# EAGLE board Analog Drum (EAGLE 9.3.1)
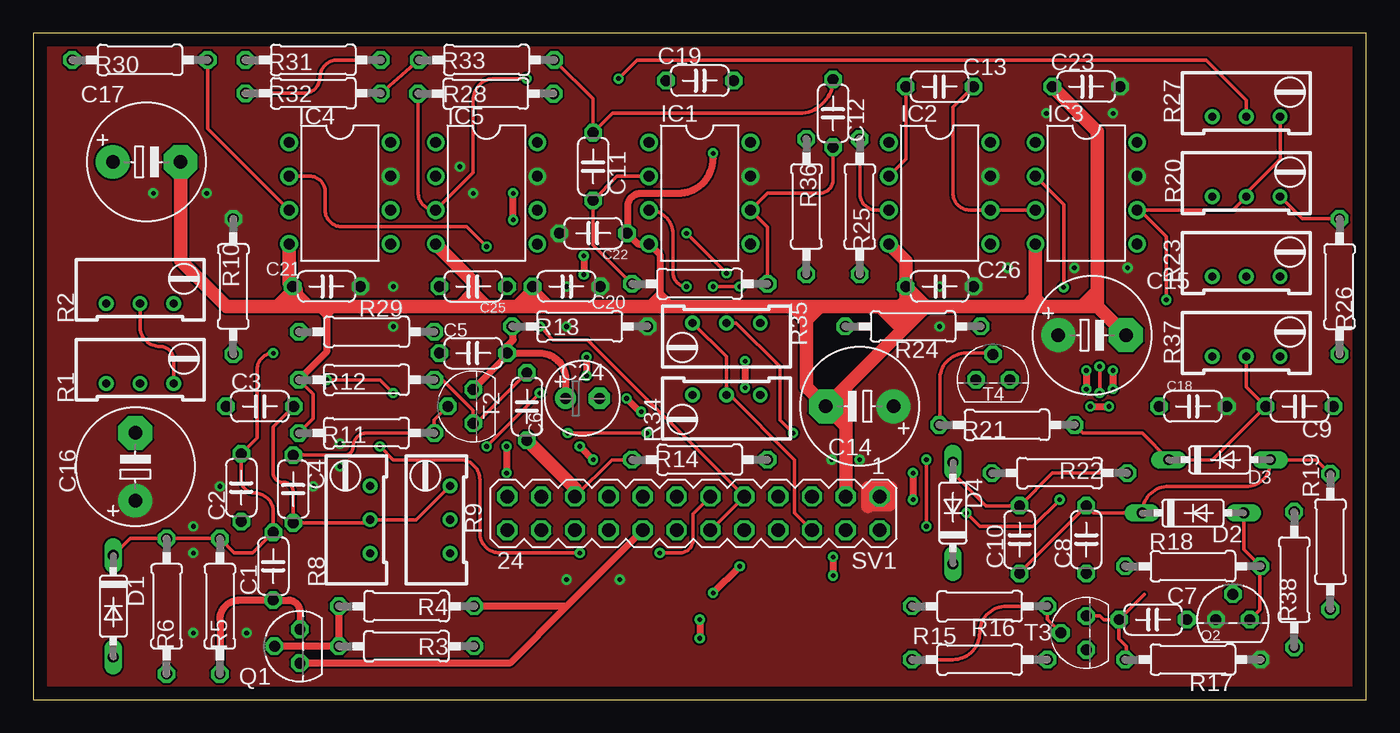
[diagram p0: board, top side]
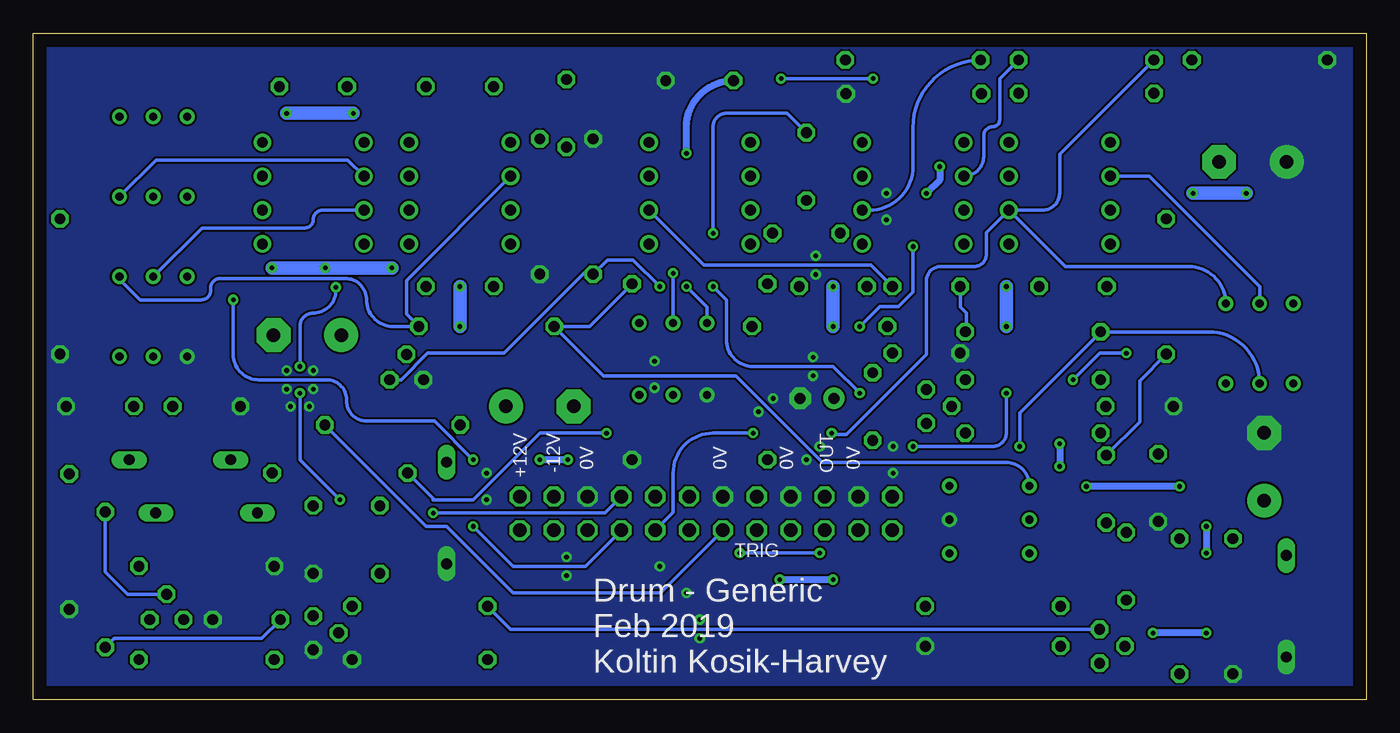
[diagram p1: board, bottom side, seen from below]

Size 100 x 50 mm. Coordinates in mm from the lower left corner, seen from the top.
Outline: 0,0 100,0 100,50 0,50 0,0
Copper layers (1*16): Top 0.035mm / dielectric 1.5mm / Bottom 0.035mm
Design rules "default": minimum track width 6mil, minimum drill 0.35mm, track to track 6mil, track to pad 6mil, pad to pad 6mil, via to via 6mil, smd to smd 6mil, copper to edge 40mil, drill to drill 6mil, minimum pad ring 10mil, minimum via ring 8mil, stop-mask expansion 4mil, vias tented up to drill 0mil, thermal gap 10mil

## Footprints (pad centres in the part's own frame; a part is rotated, then mirrored left to right if it is on the bottom)
C050-024X044 = drill 0.813 octagon: 1 -2.54,0; 2 2.54,0
E5-8,5 = drill 1.016 pad 2.54: + -2.54,0 | drill 1.016 pad 2.54 octagon: - 2.54,0
E2,5-6 = drill 0.813 pad 1.6: + -1.27,0 | drill 0.813 pad 1.6 octagon: - 1.27,0
DO35-7 = drill 0.813 long: A 3.81,0; C -3.81,0
DIL08 = drill 0.813 pad 1.27: 1 -3.81,-3.81; 2 -1.27,-3.81; 3 1.27,-3.81; 4 3.81,-3.81; 5 3.81,3.81; 6 1.27,3.81; 7 -1.27,3.81; 8 -3.81,3.81
TO92 = drill 0.813 octagon: 1 1.27,0; 2 0,1.905; 3 -1.27,0
RTRIM64W = drill 0.61: 1 1.27,-2.54; 2 1.27,0; 3 1.27,2.54
0207/10 = drill 0.813 octagon: 1 -5.08,0; 2 5.08,0
MA12-2 = drill 1.016 octagon: 1 -13.97,-1.27; 2 -13.97,1.27; 3 -11.43,-1.27; 4 -11.43,1.27; 5 -8.89,-1.27; 6 -8.89,1.27; 7 -6.35,-1.27; 8 -6.35,1.27; 9 -3.81,-1.27; 10 -3.81,1.27; 11 -1.27,-1.27; 12 -1.27,1.27; 13 1.27,-1.27; 14 1.27,1.27; 15 3.81,-1.27; 16 3.81,1.27; 17 6.35,-1.27; 18 6.35,1.27; 19 8.89,-1.27; 20 8.89,1.27; 21 11.43,-1.27; 22 11.43,1.27; 23 13.97,-1.27; 24 13.97,1.27

## Placement (x,y rotation side)
C1  0.15u  [C050-024X044]  18,10 90 top
C2  100n  [C050-024X044]  15.6,15.9 90 top
C3  100n  [C050-024X044]  17,22 0 top
C4  2.2u  [C050-024X044]  19.5,15.8 270 top
C5  1u  [C050-024X044]  33,26 180 top
C6  2.2u  [C050-024X044]  37.03,21.99 270 top
C7  100n  [C050-024X044]  84,6 180 top
C8  2.2u  [C050-024X044]  79,12 90 top
C9  2.2u  [C050-024X044]  95,22 180 top
C10  0.1u  [C050-024X044]  74,12 90 top
C11  22n  [C050-024X044]  42,40 270 top
C12  22n  [C050-024X044]  60,44 270 top
C13  47n  [C050-024X044]  68,46 180 top
C14  100uF  [E5-8,5]  62,22 180 top
C15  100uF  [E5-8,5]  79.44,27.35 0 top
C16  100uF  [E5-8,5]  7.65,17.47 90 top
C17  100uF  [E5-8,5]  8.5,40.35 0 top
C18  1u  [C050-024X044]  87,22 0 top
C19  1u  [C050-024X044]  50.01,46.45 0 top
C20  100n  [C050-024X044]  40,31 0 top
C21  100n  [C050-024X044]  22,31 0 top
C22  100n  [C050-024X044]  42,35 180 top
C23  100n  [C050-024X044]  79,46 0 top
C24  10uF  [E2,5-6]  41.2,22.6 0 top
C25  0.22u  [C050-024X044]  33,31 180 top
C26  100n  [C050-024X044]  68,31 0 top
D1  1N4148DO35-7  [DO35-7]  6,7 270 top
D2  1N4148DO35-7  [DO35-7]  87,14 0 top
D3  1N4148DO35-7  [DO35-7]  89,18 0 top
D4  1N4148DO35-7  [DO35-7]  69,14 90 top
IC1  LM741P  [DIL08]  50,38 270 top
IC2  LM741P  [DIL08]  68,38 270 top
IC3  LM741P  [DIL08]  79,38 270 top
IC4  LM741P  [DIL08]  23,38 270 top
IC5  LM741P  [DIL08]  34,38 270 top
Q1  2N3906  [TO92]  20,4 90 top
Q2  2N3906  [TO92]  90,6 0 top
R1  100k  [RTRIM64W]  8,25 270 top
R2  100k  [RTRIM64W]  8,31 270 top
R3  10k  [0207/10]  28,4 0 top
R4  4.7k  [0207/10]  28,7 180 top
R5  100k  [0207/10]  14,7 90 top
R6  4.7k  [0207/10]  10,7 90 top
R7  2200k  [0207/10]  50,31.2 0 top
R8  10k  [RTRIM64W]  24,13.5 0 top
R9  10k  [RTRIM64W]  30,13.5 0 top
R10  10k  [0207/10]  15,31 90 top
R11  10k  [0207/10]  25,20 0 top
R12  10k  [0207/10]  25,24 0 top
R13  220  [0207/10]  41,28 0 top
R14  47k  [0207/10]  50,18 180 top
R15  2.7k  [0207/10]  71,3 0 top
R16  8.2k  [0207/10]  71,7 0 top
R17  100k  [0207/10]  87,3 180 top
R18  4.7k  [0207/10]  87,10 180 top
R19  10k  [0207/10]  97.31,11.85 270 top
R20  100k  [RTRIM64W]  91,39 270 top
R21  47k  [0207/10]  73.05,20.61 180 top
R22  1M  [0207/10]  77,17 0 top
R23  100k  [RTRIM64W]  91,33 270 top
R24  47k  [0207/10]  66,28 180 top
R25  22k  [0207/10]  62,37 270 top
R26  10k  [0207/10]  98,31 270 top
R27  100k  [RTRIM64W]  91,45 270 top
R28  1k  [0207/10]  33.95,45.47 0 top
R29  560  [0207/10]  25,27.6 180 top
R30  22k  [0207/10]  8,48 180 top
R31  10k  [0207/10]  21,48 180 top
R32  1k  [0207/10]  21,45.5 180 top
R33  1M  [0207/10]  34,48 180 top
R34  100k  [RTRIM64W]  52,21.6 90 top
R35  10k  [RTRIM64W]  52,27 90 top
R36  11k  [0207/10]  58,37 270 top
R37  10k  [RTRIM64W]  91,27 270 top
R38  100  [0207/10]  94.6,9 270 top
SV1  [MA12-2]  49.53,13.97 180 top
T2  2N3904  [TO92]  33,22 90 top
T3  2N3904  [TO92]  79,5 90 top
T4  2N3904  [TO92]  72,24 0 top

## Library data of the parts
C1-C13 C18-C23 C25 C26 R3-R7 R10-R19 R21 R22 R24-R26 R28-R33 R36 R38 = resistor
C14-C17 C24 = rcl; SPICEPREFIX: C
D1-D4 = diode
IC1-IC5 = linear
Q1 Q2 = transistor-pnp
R1 R2 R8 R9 R20 R23 R27 R34 R35 R37 = rcl; SPICEMODEL: X; SPICEPREFIXL: POT
SV1 = con-lstb; OC_FARNELL: unknown; OC_NEWARK: unknown
T2-T4 = transistor

## Nets
0V: C2.1 C3.1 C5.2 C7.1 C8.1 C9.1 C16.- C17.+ C18.1 C19.2 C24.- D1.A D4.C R3.2 R6.1 R9.2 R14.1 R15.2 R18.2 R19.2 R25.2 R26.2 R28.2 R30.2 R34.3 R36.1 R37.1 SV1.5 SV1.13 SV1.17 SV1.21 T3.3 T4.3
+5V: SV1.2
+12V: C14.+ C15.+ C16.+ C18.2 C20.2 C21.2 C22.2 C23.2 C26.2 IC1.7 IC2.7 IC3.7 IC4.7 IC5.7 Q2.3 R10.2 R13.2 R17.1 SV1.1
-12V: C14.- C15.- C17.- C19.1 C20.1 C21.1 C22.1 C23.1 C26.1 IC1.4 IC2.4 IC3.4 IC4.4 IC5.4 R11.1 R12.1 SV1.3
BUFFERED: C1.1 Q1.1 R5.1 R16.1
DGND: SV1.4
N$1: C25.2 R29.1
N$2: IC4.3 R30.1
N$3: Q1.2 R3.1 R4.2
N$4: C10.2 D4.A R22.2
N$5: Q2.2 R38.1
N$7: IC2.3 R25.1
N$8: C3.2 C4.2 R8.2 R9.3
N$9: C4.1 R10.1 R11.2 T2.2
N$10: C6.1 R12.2 T2.3
N$11: C5.1 C24.+ R13.1 T2.1
N$12: C13.2 IC2.2 R23.3 R24.1
N$13: R15.1 R16.2 T3.2
N$14: C7.2 R17.2 R38.2 T3.1
N$15: D2.A Q2.1 R18.1
N$16: C8.2 C10.1 D2.C D3.A R19.1
N$18: R21.2 T4.2
N$19: C13.1 IC2.6 IC3.3 R23.2
N$22: IC5.3 R27.2 R28.1
N$24: SV1.23
N$25: SV1.24
N$26: SV1.22
N$29: IC5.2 R31.1 R32.2
N$31: IC5.6 R32.1 R33.2
OUTPUT: C6.2 R14.2 SV1.19
POT1: R34.2 R35.3 R36.2 SV1.6 T4.1
POT3: IC3.6 R20.2 R27.3 SV1.8
POT4: IC3.2 R20.3 R26.1 SV1.7
POT5: IC4.6 R2.3 R31.2 SV1.10
POT6_7: IC4.2 R1.3 R2.2 SV1.9 SV1.12
POT8: R1.2 R29.2 SV1.11
POT9: C9.2 D3.C R21.1 R37.2 SV1.14
RES_FB: C11.2 IC1.2 R7.1
RES_FTR_COM: C11.1 C12.1 R22.1 R33.1 R35.2
RES_FTR_OUT: C12.2 C25.1 IC1.6 R7.2 R8.3 R24.2
RES_TRIG: C1.2 C2.2 D1.C IC1.3 R5.2 R6.2
SW1: SV1.18
SW2: SV1.20
SW3: SV1.15
TRIGGER: Q1.3 R4.1 SV1.16

## Tracks (layer width: path | path; a pad name or v marks a point on that pad's centre or on a via)
0V  (via drill 0.35)
  Top 0.508: v50,6 v50,4.6 | v35.5,19 v35.5,17 | v53.4,25.4 v53.4,23.4 | v51,8 v53,10 | v60,10.7 v60,9.3 | v36,36 v36,38 | v66,17 v66,15 | v79.3,22 v80.7,22 | v79,24.7 v79,23.3 | v81,24.7 v81,23.3 | v41,19 v42,18 | v44.5,22.6 45.5,21.6 v45.6,21.6 | v41.5,25.7 v41.5,24.3 | v41.3,33.3 v41.3,31.9
  pour Bottom (no thermals): -2,52 102,52 102,-2 -2,-2
+12V  (via drill 0.35)
  Top 1.016: 62.6,14.5 62.6,15.9 64.3,15.9 64.3,14.7 64.2,14.6 63,14.6
  Bottom 0.508: v40,9 v44,9 | v12,5 v16,5 | v59.9,18 v62,18 | v32,40 32,39 v33,38 | v12,13 v12,11 | v14,16 v21,16 | v23,19.2 v23,17.5
  Bottom 1.016: v40,31 v40,28 | v27,31 v27,28 | v68,31 v68,28 | v73.1,32.4 v78.1,32.4 v82.1,32.4 | v76,44 v81,44 | v9,38 v13,38
  pour Top (no thermals): -1,51 -1,-1 101,-1 101,51
-12V  (via drill 0.35)
  Top 0.254: R12.1 21,22.92 21,21.08 R11.1 | 22.9,29.5 22,28.6 21.3,29.3
  Top 0.508: 39,29.5 38.96,29.5 C20.1 36,29.54 36,29.5 | 18,29.5 18,29.54 C21.1 20.96,29.5 21,29.5 | 79.83,31 78.33,29.5 78,29.5 | 47,30.5 47,33.38 IC1.4 45.35,34.19 C22.1 arc90 44.6,35.06 44.6,37 arc-90 45.6,38 48.4,38 arc90 51,40.6 v51,41 | 47,30.5 47,29.5 | 48,29.5 47,30.5 | 46,29.5 47,30.5 | 22,29.5 22,28.6 22,26.08 R12.1
  Top 1.016: SV1.3 60.96,20.5 | 60.96,20.5 C14.- | C14.- 60.73,23.27 | 60.73,23.27 65.23,27.77 | 65.23,27.77 66.96,29.5 | 79.83,29.5 C15.- | 66.96,29.5 74.5,29.5 | 74.5,29.5 75,29.5 | 75,29.5 75.8,29.5 | 75.8,29.5 78,29.5 79.33,29.5 | 79.33,29.5 79.83,29.5 | IC3.4 75.19,30.19 | 75.19,30.11 75.19,29.69 75,29.5 | C23.1 79.83,42.63 79.83,31 79.83,30 | 79.83,30 79.83,29.5 | IC2.4 65.46,32.92 C26.1 | C26.1 66.96,29.5 | 66.96,29.5 65,29.5 | 65,29.5 63.5,29.5 | 63.5,29.5 59,29.5 | 59,29.5 58,29.5 | 58,29.5 57,29.5 | 57,29.5 48,29.5 47,29.5 46,29.5 39,29.5 38,29.5 | 38,29.5 37,29.5 | 37,29.5 36,29.5 34,29.5 | 34,29.5 33,29.5 | 33,29.5 32,29.5 | 32,29.5 22.9,29.5 22,29.5 21,29.5 20,29.5 | C21.1 19.73,30.73 19.73,30.23 19,29.5 | IC4.4 19.19,31.27 C21.1 | IC5.4 33,31.38 33,30.5 | 33,30.5 33,29.5 | 38,29.5 37.46,30.04 C20.1 37.46,29.96 37,29.5 | 33,30.5 34,29.5 | 33,30.5 32,29.5 | C26.1 65.46,29.96 65,29.5 | 75.19,30.19 75.19,30.11 | 75.19,30.11 75.8,29.5 | 75.19,30.19 74.5,29.5 | 79.83,30 79.33,29.5 | C17.- 11.04,32.96 14.5,29.5 18,29.5 19,29.5 | 19,29.5 20,29.5 | C21.1 19.46,30.04 20,29.5 | 60.96,20.5 60.96,23.04 60.73,23.27 | C14.- 58,23.46 58,28.5 | 58,28.5 58,29.5 | 58,28.5 59,29.5 | 58,28.5 57,29.5 | 65.23,27.77 65.23,29.27 65,29.5 | 65.23,27.77 63.5,29.5
  Bottom 0.508: v51,41 51,42.92 arc90 C19.1
BUFFERED
  Top 0.508: Q1.1 20,6.6 arc90 19.14,7.46 C1.1 15.46,7.46 arc90 14,6 R5.1
  Bottom 0.254: Q1.1 64.19,5.27 R16.1
N$1
  Bottom 0.254: C25.2 30.46,29.46 30,29 30,27.68 R29.1
N$2
  Top 0.254: R30.1 13.08,42.84 IC4.3
N$3
  Top 0.508: R4.2 R3.1 Q1.2
N$4
  Top 0.254: R22.2 76.46,17 C10.2 71.46,14.54 69,17 D4.A
N$5
  Bottom 0.254: R38.1 94.6,9.6 92.91,7.91 Q2.2
N$7
  Top 0.254: R25.1 62,38 arc90 63.27,36.73 IC2.3
N$8
  Top 0.254: C3.2 18,20.46 18,17 arc90 18.7,16.3 18.8,16.3 arc-90 19.5,15.6 C4.2 25.03,13.26 R8.2 28.73,13.5 R9.3
N$9
  Top 0.254: T2.2 30.08,20.98 R11.2 25,20 arc90 24,19 arc-90 23.34,18.34 C4.1
  Bottom 0.254: R10.1 17,23.92 17,20.84 C4.1
N$10
  Top 0.254: R12.2 30.7,24 33,21.7 T2.3 33.23,20.73 C6.1
N$11
  Top 0.254: 35.54,25.81 C5.1
  Top 0.508: T2.1 35.54,25.81 | C24.+ 39.93,24.07 arc90 38,26 C5.1 35.54,26.54 36,27 36,27.92 R13.1
N$12
  Top 0.254: C13.2 65.46,40.54 IC2.2
  Bottom 0.254: IC2.2 72,31.46 72,28.92 R24.1 73,28 arc90 75,30 arc-90 76.6,31.6 86,31.6 arc-90 86.7,30.9 86.7,30.7 arc90 87.4,30 92,30 93.54,31.54 R23.3
N$13
  Top 0.254: T3.2 76.08,6.01 R16.2 73,7 arc90 71,5 arc-90 69,3 R15.1
N$14
  Top 0.254: T3.1 80.03,6.27 80.3,6 C7.2 | C7.2 81.46,4.54 82,4 82,3.08 R17.2 | C7.2 83.36,7.91
  Bottom 0.254: R38.2 93.92,4.6 82.86,4.6 C7.2
N$15
  Top 0.254: D2.A 90.81,13 90.81,11.27 R18.1 92,9.92 92,6.73 Q2.1
N$16
  Top 0.254: R19.1 96.24,18 D3.A 92.81,17.81 arc-90 91,16 85.19,16 arc90 D2.C 79.54,14 C8.2 74,9.54 C10.1
N$18
  Top 0.254: R21.2 68,20.64 68,24 arc-90 70,26 72,26 T4.2
N$19
  Top 0.254: IC3.3 IC2.6 70.27,36.73 arc-90 69,38 69,44.46 C13.1
  Bottom 0.254: R23.2 87.33,35.4 79.6,35.4 arc-90 79,36 arc90 78.27,36.73 IC3.3
N$22  (via drill 0.35)
  Top 0.254: v37,46.6 34.6,46.6 arc90 33,45 33,39.54 IC5.3 arc-90 28.87,38.05 R28.1 | v43.9,46.6 45.3,48 88,48 91,45 R27.2
  Bottom 0.254: v37,46.6 v43.9,46.6
N$29
  Top 0.254: R32.2 20.3,45.5 arc90 21.5,46.7 arc-90 22.8,48 R31.1
  Bottom 0.254: R31.1 27.5,46.58 27.5,43.5 arc90 28,43 arc-90 28.7,42.3 28.7,40.76 arc90 IC5.2
N$31
  Top 0.254: R32.1 R33.2
  Bottom 0.254: R33.2 arc-90 34,42.92 34,40 arc90 37.27,36.73 IC5.6
OUTPUT
  Top 0.254: R14.2 43.4,18 SV1.19
  Top 1.016: C6.2 40.64,15.84 SV1.19
POT1  (via drill 0.35)
  Top 0.254: R35.3 52,25.73 52,23 | 52,23 R34.2 | SV1.6 57.1,14.02 57.1,18 52.1,23 52,23 | v53,31 v51,31
  Bottom 0.254: T4.1 72.4,24 70.4,26 64.7,26 58.7,32 58.08,32 R36.2 56.92,33 55,33 v53,31 | v51,31 49.46,29.46 R35.3
POT3  (via drill 0.35)
  Top 0.254: IC3.6 83,36.73 | 83,36.73 90,36.73 R20.2 91,38 93.54,40.54 R27.3 | v67,13 v67,18 | v85,30 85,34.73 83,36.73
  Bottom 0.254: SV1.8 58.58,10 64,10 v67,13 | v67,18 69.9,20.9 75,20.9 arc90 76.5,22.4 76.5,22.5 arc-90 78,24 83.1,24 arc90 85,25.9 v85,30
POT4  (via drill 0.35)
  Top 0.254: R20.3 95.19,36.08 R26.1 | v70,14 71,13 75,13 v77,15 | v80,23 v80,25 | v77.3,30.94 77.3,37.16 IC3.2
  Bottom 0.254: IC3.2 76.42,40.5 90.77,40.5 R20.3 | SV1.7 57.12,14 v70,14 | v77,15 80,18 v80,23 | v80,25 80,28 arc90 79,29 arc-90 77.3,30.7 v77.3,30.94
POT5  (via drill 0.35)
  Top 0.254: v40.1,20 v46,20
  Bottom 0.254: R31.2 23,40.92 23,38 arc90 24.27,36.73 IC4.6 | IC4.6 28.5,35.04 28.5,33.4 arc90 29.4,32.5 31.9,32.5 arc-90 33,31.4 33,25.9 39,19.9 40,19.9 v40.1,20 | v46,20 49,20 arc-90 52,17 52,14.04 SV1.10 | R2.3 arc-90 13.31,32.5 22.58,32.5 IC4.6
POT6_7  (via drill 0.35)
  Top 0.254: SV1.12 SV1.9 41.58,27 39,27 v38,28 | R1.3 10.54,25.46 arc90 9.5,26.5 arc-90 8,28 R2.2 | v34,34 32.5,35.5 23.1,35.5 arc-90 21.9,36.7 21.9,38.1 arc90 20.73,39.27 IC4.2
  Bottom 0.254: R2.2 8,31 16.27,39.27 IC4.2 | v38,28 36.5,29.5 35.1,29.5 34,30.6 v34,34
POT8  (via drill 0.35)
  Top 0.254: v26,19 27,18 32,18 arc-90 33.5,16.5 33.5,12.5 arc90 35,11 v41,11 | v47,11 48.5,11 arc90 49.5,12 49.5,13.94 SV1.11
  Bottom 0.254: v26,19 26,21.52 R29.2 11.87,27.6 arc90 R1.2 | v41,11 v47,11
POT9
  Top 0.254: R37.2 91,23.46 C9.2 88.46,18 D3.C 83.19,20 78.74,20 R21.1
  Bottom 0.254: SV1.14 52.96,8 64,8 69,13 70.52,13 R21.1
RES_FB
  Top 0.254: R7.1 42,34.12 C11.2 43.81,39.27 IC1.2
RES_FTR_COM  (via drill 0.35)
  Top 0.254: v57,20 56,21 56,25 52.73,28.27 R35.2 | R33.1 42,45.08 C11.1 43.46,44 57,44 57.46,44 arc90 C12.1 | v52,32 v49,35
  Bottom 0.254: R22.1 70,15.08 70,15 67,15 62,20 v57,20 | R35.2 v52,32 | v49,35 49,43 arc90 48,44 43.46,44 C11.1
RES_FTR_OUT
  Top 0.254: R7.2 55.08,35.46 IC1.6 55.08,38 59,38 arc90 60,39 C12.2
  Bottom 0.254: R7.2 58.28,28 R24.2 57.22,24.3 47.3,24.3 40.8,17.8 27.03,17.8 arc90 R8.3 | IC1.6 49.68,32.6 37.14,32.6 C25.1
RES_TRIG  (via drill 0.35)
  Top 0.254: D1.C 7.27,12.08 R6.2 R5.2 15.08,11 16.46,11 C1.2 18,14.1 arc90 16.6,15.5 arc-90 15.6,16.5 C2.2 16.8,19.64 16.8,24.8 arc-90 v18,26 | v38,23 v34,19 | v27,23 26,24 v22,24 | v49,31 arc-90 48,32 48,34.92 arc90 IC1.3
  Bottom 0.254: v49,31 48,30 48,27 arc-90 46,25 40,25 v38,23 | v34,19 28,19 arc-90 27,20 v27,23 | v22,24 20,26 v18,26
TRIGGER
  Top 0.508: SV1.16 40.02,7 | 40.02,7 R4.1 | 40.02,7 35.75,2.73 Q1.3

## Text on the board
bNames: OUT | -12V | +12V | 0V | 0V | 0V | 0V | TRIG | Drum - Generic / Feb 2019 / Koltin Kosik-Harvey